# Altium PCB fullflex-1.PcbDoc (part 1 of 2)
Units mil, origin at the board's own origin, x right, y up, seen from the top; angles counter-clockwise.
Board outline 1000.01 x 1200 mil, 4 copper layers (NiCuAu, RF Layer, RF Ground, Signal Layer), stack 13.386 mil thick; 55 components, 23 nets, 173 pads, 89 vias.
Unrouted connection lines stored in the file: 143.
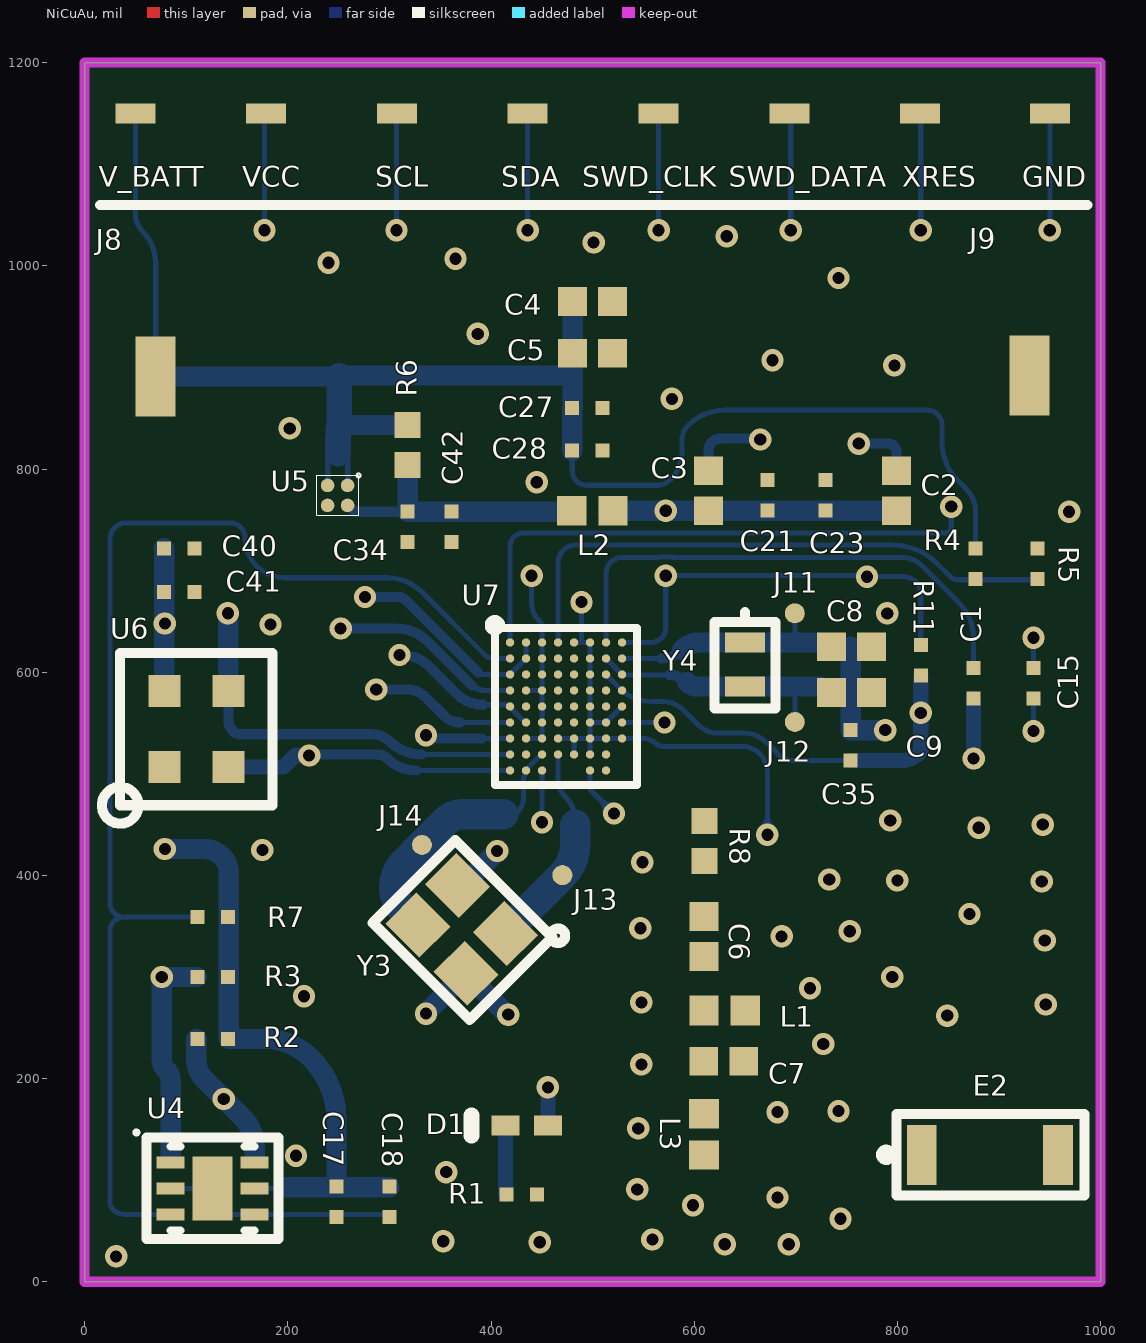
[diagram p0: NiCuAu view]
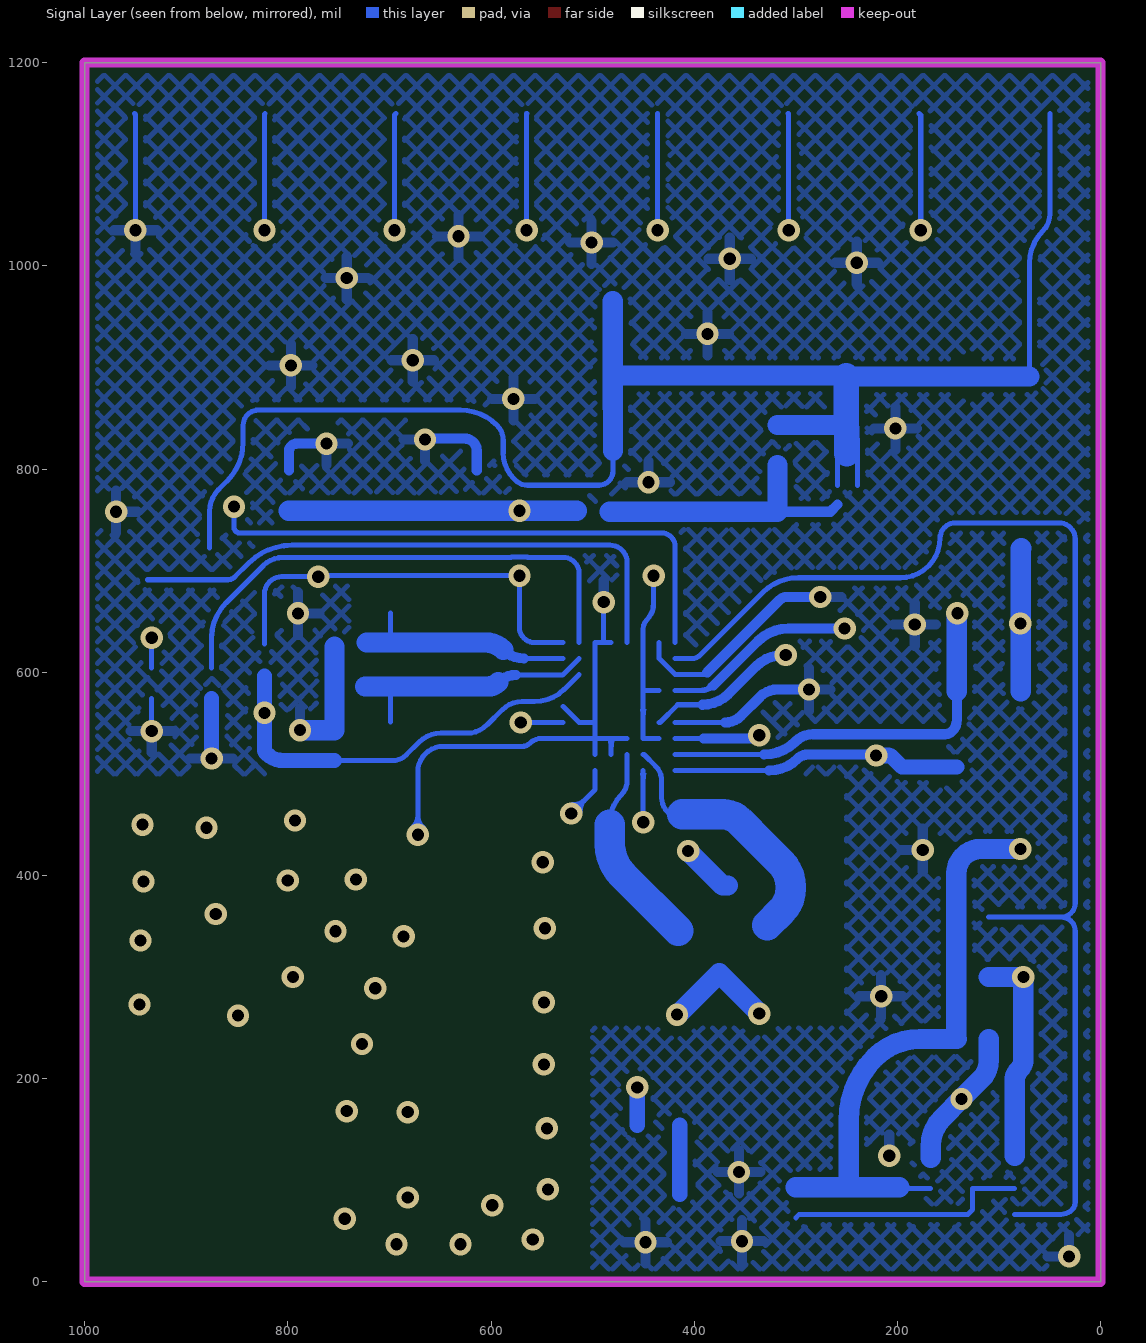
[diagram p1: Signal Layer view, seen from below]
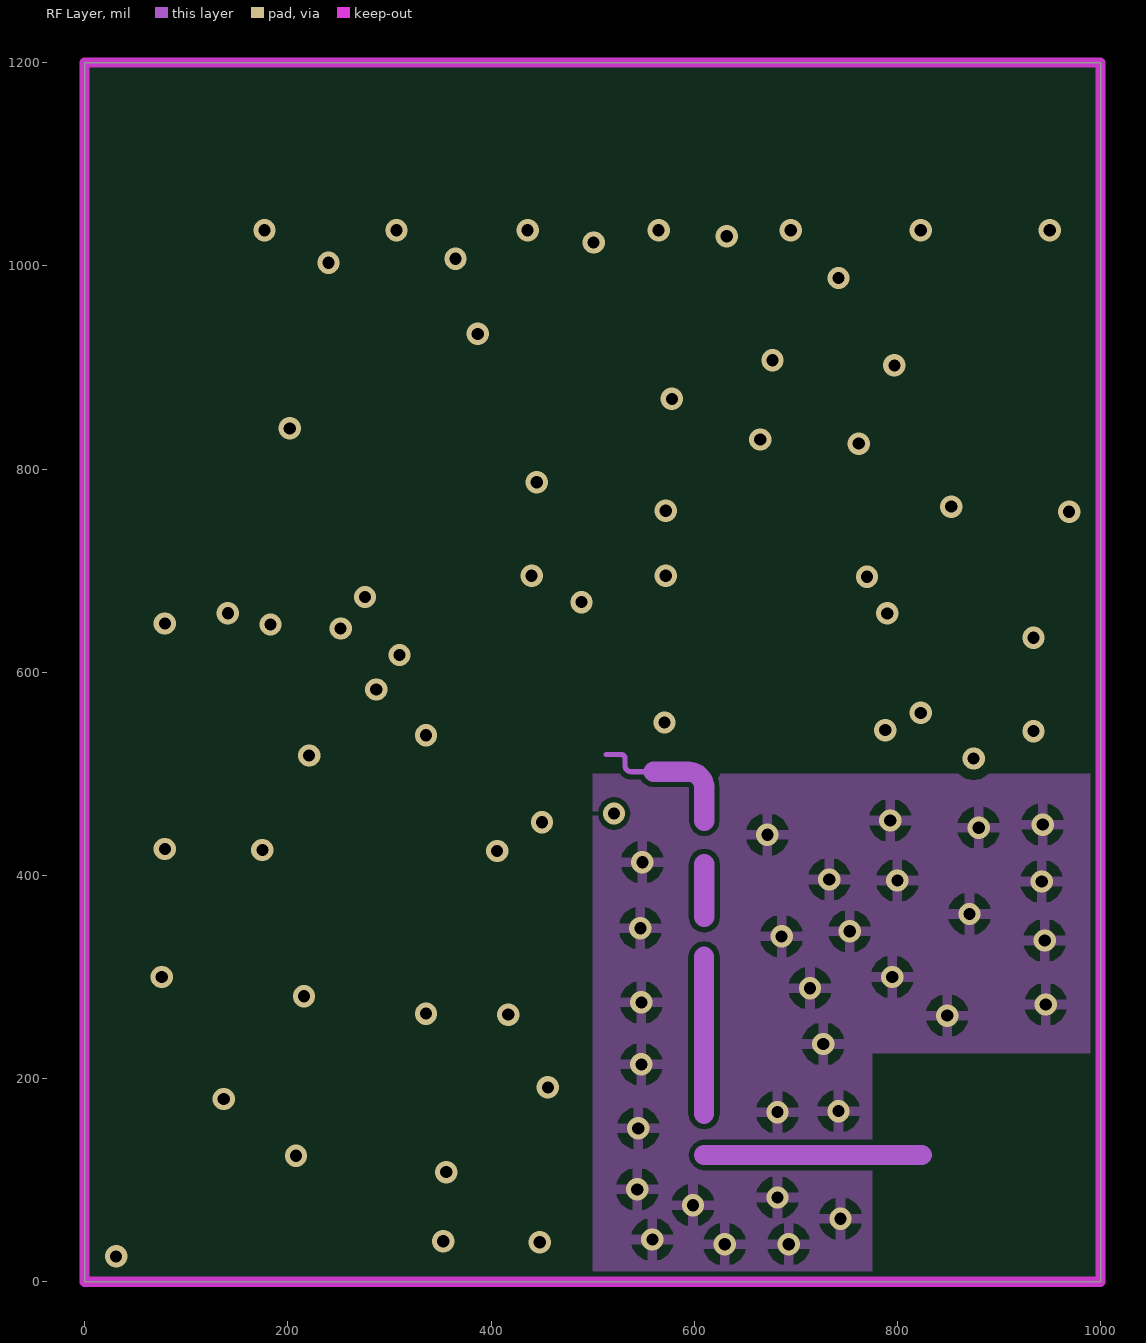
[diagram p2: RF Layer]
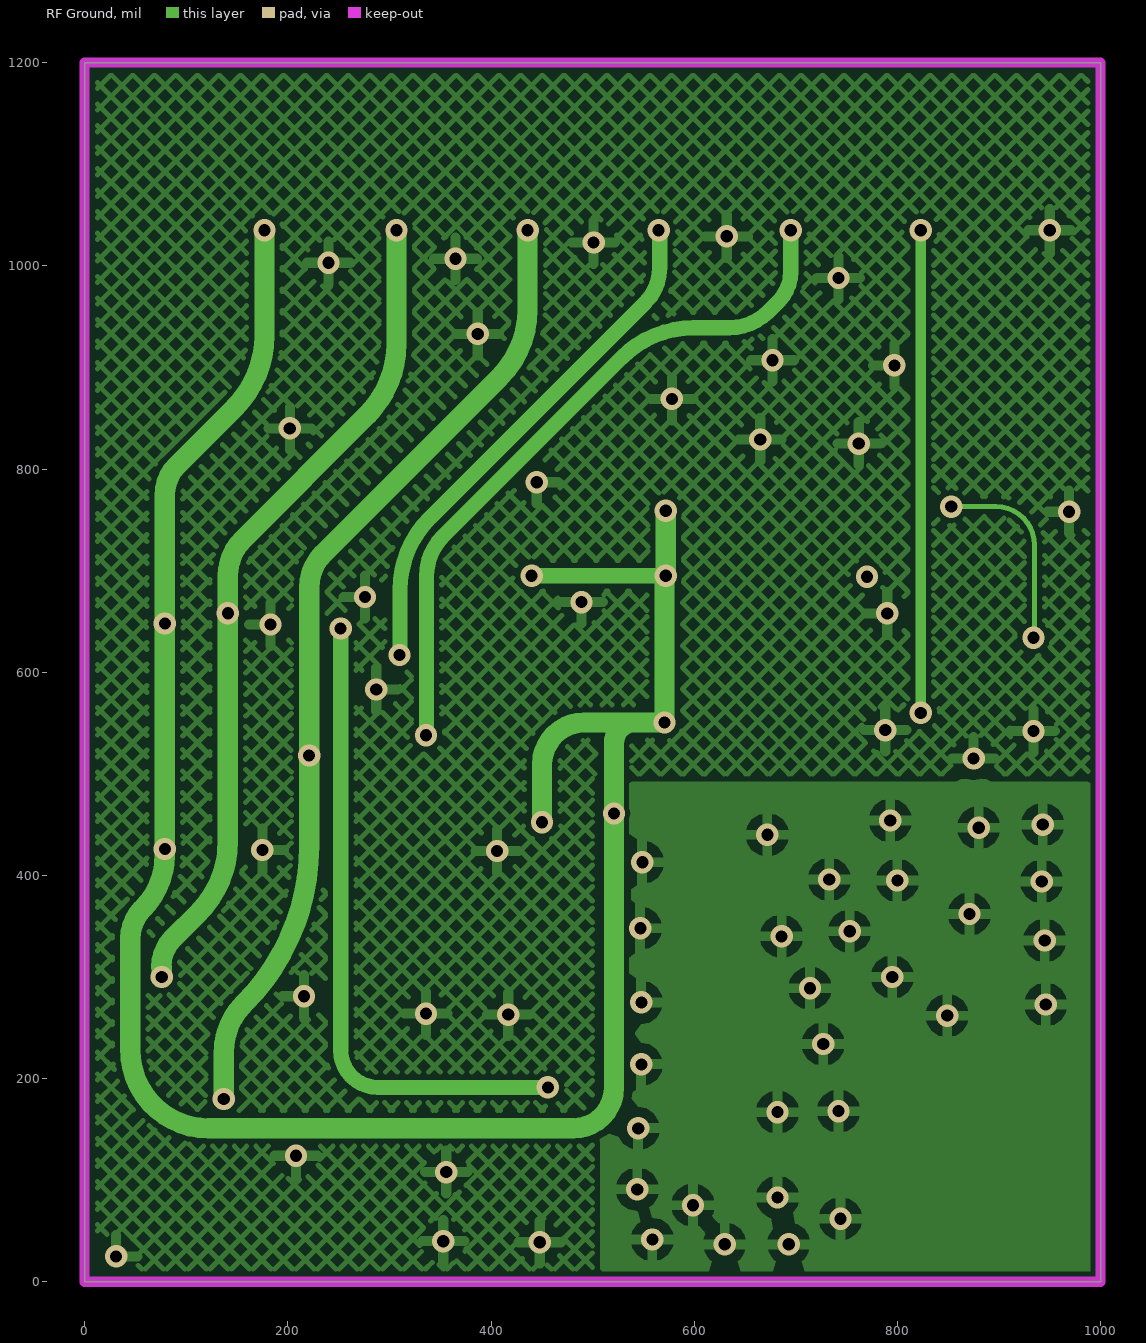
[diagram p3: RF Ground]

## Layer stack, top to bottom
Polyimide-1: solder mask 0.4, Solder Resist, Dk 3.5
NiCuAu: signal copper 0.04
Polyimide-2: prepreg 5, Polyimide, Dk 4.2
RF Layer: signal copper 1.417
Polyimide-3: dielectric 0.472, Dk 3.4
RF Ground: signal copper 1.417
Polyimide-4: prepreg 5, Dk 4.2
Signal Layer: signal copper 0.04

## Board outline
0,0 1000.01,0 999.92,1200 0,1200

## Design rules (kind name [scope] priority, off if disabled: settings)
Clearance "pour clearance" [(InNet('GND'))] p1: gap=5 ignorepadtopadclearanceinfootprint=FALSE
Clearance [All] p2: gap=5 ignorepadtopadclearanceinfootprint=FALSE
ComponentClearance [All] p1: gap=15.75 collisioncheckmode=3 verticalgap=10 showdistances=FALSE
DiffPairsRouting [All] p1: maxlimit=10 minlimit=5 mostfreqgap=10 toplayer_minwidth=5 toplayer_maxwidth=35 toplayer_prefwidth=7.5 midlayer1_minwidth=5 midlayer1_maxwidth=15 midlayer1_prefwidth=7.5 midlayer2_minwidth=5 midlayer2_maxwidth=15 midlayer2_prefwidth=7.5 bottomlayer_minwidth=5 bottomlayer_maxwidth=35 bottomlayer_prefwidth=7.5 maxuncoupledlength=500
FabricationTestPointUsage TestPointUsage [All] p1: valid=0 allowmultiple=FALSE
FabricationTestpoint Testpoint [All] p1: side=3 testpointundercomponent=TRUE minsize=40 maxsize=100 preferedsize=60 minholesize=0 maxholesize=40 preferedholesize=32 testpointgrid=1 allowsidetop=TRUE allowsidebottom=TRUE usegrid=TRUE gridtolerance=0.01
HoleSize [All] p1: absolutevalues=TRUE maxlimit=100 minlimit=12 maxpercent=80.000 minpercent=20.000
HoleToHoleClearance [All] p1: gap=16 allowstackedmicrovias=TRUE
MinimumAnnularRing [All] p1: minimumring=5
MinimumSolderMaskSliver [All] p1: minsoldermaskwidth=4
PolygonConnect [All] p1: connectstyle=Relief reliefconductorwidth=10 reliefentries=4 polygonreliefangle="90 Angle" airgapwidth=10
RoutingCorners [All] p1: cornerstyle=45-Degree minsetback=5 maxsetback=30
RoutingVias [All] p1: holewidth=12 width=22 viastyle="Through Hole" minholewidth=6 minwidth=20 maxholewidth=28 maxwidth=25
ShortCircuit [All] p1: allowed=TRUE
SilkToSilkClearance [All] p1: silktosilkclearance=6
SilkToSolderMaskClearance SilkscreenOverComponentPads [IsPad] p1: minsilkscreentomaskgap=6 clearancetoexposedcopper=TRUE
SolderMaskExpansion [All] p1: expansion=3
Width [All] p1: maxlimit=100 minlimit=5 preferedwidth=5
19 further rules are at their usual default settings.

## Classes and differential pairs
differential pair XTAL_LF: +XTAL_LF_P -XTAL_LF_N
differential pair XTAL_HF: +XTAL_HF_P -XTAL_HF_N

## Components (designator, comment, footprint, x,y, rotation, side; value= is the part's Value field where it differs from the comment)
C1 "1uF" CAP_0201(0603)_M 875,589 r270 top
C2 "10uF" CAP_0402(1005)_M 799,778.68 r90 top
C3 "10uF" CAP_0402(1005)_M 614,778.68 r90 top
C4 "10uF" CAP_0402(1005)_M 500,965 r0 top
C5 "10uF" CAP_0402(1005)_M 500,914 r0 top
C6 "0.5pF" CAP_0402(1005)_M 609.65,339.77 r270 top
C7 "2pF" CAP_0402(1005)_M 629,217 r0 top
C8 "39pF" CAP_0402(1005)_M 754.69,625 r0 top
C9 "18pF" CAP_0402(1005)_M 754.69,580 r0 top
C15 "1uF" CAP_0201(0603)_M 934,589 r270 top
C17 "100nF" CAP_0201(0603)_M 248,79 r270 top
C18 "1uF" CAP_0201(0603)_M 300,79 r270 top
C21 "1uF" CAP_0201(0603)_M 672,773.96 r90 top
C23 "1uF" CAP_0201(0603)_M 729,773.96 r90 top
C27 "1uF" CAP_0201(0603)_M 494.96,860 r0 top
C28 "1uF" CAP_0201(0603)_M 494.96,818 r0 top
C34 "100nF" CAP_0201(0603)_M 318,743.04 r270 top
C35 "100pF" CAP_0201(0603)_M 754,528 r90 top
C40 "1uF" CAP_0201(0603)_M 93,722 r180 top
C41 "100nF" CAP_0201(0603)_M 93,679 r180 top
C42 "1uF" CAP_0201(0603)_M 361,743.04 r270 top
D1 "Red" LED_0402(1005) 436,154 r180 top
E2 "2450AT18B100" 2450AT18B100 824,125 r0 top
GND "Probe-Pin Pad" POGO-PIN-PAD 950,1150 r90 top
J8 "Battery_Connector" BATTERY_PAD 70,891 r0 top
J9 "Battery_Connector" BATTERY_PAD 930,892 r0 top
J11 "Probe-CLOCK" POGO-CLOCK-PAD 699,658 r90 top
J12 "Probe-CLOCK" POGO-CLOCK-PAD 699,551 r90 top
J13 "Probe-CLOCK" POGO-CLOCK-PAD 470.27,400.27 r90 top
J14 "Probe-CLOCK" POGO-CLOCK-PAD 332,430 r270 top
L1 "2nh" IND_0402(1005)_M 630,267 r180 top
L2 "1uh" IND_0402(1005)_M 499.75,759 r0 top
L3 "9nh" IND_0402(1005)_M 609.65,145.08 r270 top
R1 "270R" RES_0201(0603)_M 430.09,86 r0 top
R2 "4.7kR" RES_0201(0603)_M 126,239 r180 top
R3 "4.7kR" RES_0201(0603)_M 126,300 r180 top
R4 "100kR" RES_0201(0603)_M 877,706.75 r270 top
R5 "30kR" RES_0201(0603)_M 938,706.75 r90 top
R6 "0mR" RES_0402(1005)_M 318,823.69 r270 top
R7 "4.7kR" RES_0201(0603)_M 126.25,359 r0 top
R8 "0mR" RES_0402(1005)_M 610,434 r270 top
R11 "4.7kR" RES_0201(0603)_M 823,612 r270 top
SCL "Probe-Pin Pad" POGO-PIN-PAD 307.43,1150 r90 top
SDA "Probe-Pin Pad" POGO-PIN-PAD 436.14,1150 r90 top
SWD_CLK "Probe-Pin Pad" POGO-PIN-PAD 564.86,1150 r90 top
SWD_DATA "Probe-Pin Pad" POGO-PIN-PAD 693.57,1150 r90 top
U4 "TMP116" WSON-6 126,92 r0 top
U5 "ADP172" ADP172 249,774 r270 top
U6 "GUVB-C31SM" GUVB-C31SM 110,544 r180 top
U7 "CY8C4127FNI-BL483" WLCSP-68 473.87,566.25 r0 top
V_BATT "Probe-Pin Pad" POGO-PIN-PAD 50,1150 r90 top
VCC "Probe-Pin Pad" POGO-PIN-PAD 178.71,1150 r90 top
XRES "Probe-Pin Pad" POGO-PIN-PAD 822.29,1150 r90 top
Y3 "ECX-2236" ECX-2236 414.33,342.67 r135 top
Y4 "32.768KHz" ABS05 649.87,629.25 r270 top

## Footprints (in the part's own frame and the unit in brackets; to place one, negate y for a bottom-side part, rotate by r counter-clockwise, add the part's x,y. Pads: shape width x height; smd on the part's side, far side on the other; paste and mask are expansions set on the pad)
2450AT18B100 [mm] "2.4GHz Mini Antenna SMD, 50 ohm Resistence"
  rect 0.74x1.5 smd mask+0.03: 1(0,0) 2(3.406,0)
  silkscreen extent -1.02,-1.02 4.06,1.02, body extent -0.05,-0.9 3.35,0.9, height 1.4
ABS05 [mm] "32.768 kHz CRYSTAL 12.5 PF +/-20ppm"
  rect 0.5x1 smd mask+0.1: 1(0,0) 2(1.102,0)
  silkscreen extent -0.76,-0.76 1.65,0.76, body extent -0.25,-0.5 1.35,0.5, height 0.5
ADP172 [mm] "4-Ball WLCSP, CB-4-4"
  round 0.34 smd paste+0.01 mask+0.01: A1(-0.25,0.25) A2(0.25,0.25) B1(-0.25,-0.25) B2(0.25,-0.25)
  silkscreen extent -0.55,-0.53 0.5,0.58, body extent -0.48,-0.48 0.48,0.48, height 0.69
BATTERY_PAD [mm]
  rect 1x2 smd: 1(0,0)
CAP_0201(0603)_M [mm] "Chip Capacitor, Body 0.6x0.3mm, Height 0.33mm, IPC Low Density"
  rect 0.35x0.35 smd mask+0: 1(-0.381,0) 2(0.381,0)
  body extent -0.31,-0.17 0.32,0.16, height 0.33
CAP_0402(1005)_M [mm] "Chip Capacitor, Body 1.0x0.5mm, Height 0.6mm, IPC Low Density"
  rect 0.72x0.72 smd: 1(-0.5,0) 2(0.5,0)
  body extent -0.55,-0.3 0.55,0.3, height 0.6
ECX-2236 [mm] "48 MHz CRYSTAL 2.5X2.0mm"
  rect 1.2x1.1 smd mask+0.05: 1(0,0) 2(1.7,0) 4(0,1.4)
  rect 1.2x1.1 smd paste+0 mask+0.05: 3(1.7,1.4)
  silkscreen extent -1.14,-1.07 2.54,2.16, body extent -0.36,-0.24 2.14,1.76, height 0.8
GUVB-C31SM [mm]
  rect 0.8x0.8 smd: 1(0.8,0.95) 2(-0.8,0.95) 3(-0.8,-0.95) 4(0.8,-0.95)
  silkscreen extent -1.91,-1.91 2.36,2.36, body extent -1,-1.15 1,1.15, height 1.4
IND_0402(1005)_M [mm] "Chip Inductor, 2-Leads, Body 1.1x0.6mm, IPC Low Density"
  rect 0.73x0.74 smd: 1(-0.515,0) 2(0.515,0)
  body extent -0.55,-0.3 0.55,0.3, height 0.45
LED_0402(1005) [mm] "SMD, 2-Leads, Body 1x0.5mm"
  rect 0.7x0.5 smd: A(-0.508,0) K(0.55,0)
  silkscreen extent 1.4,-0.25 1.4,0.25, body extent -0.5,-0.25 0.5,0.25, height 0.6
POGO-CLOCK-PAD [mm]
  round 0.5 smd: 1(0,0)
POGO-PIN-PAD [mm]
  rect 0.5x1 smd: 1(0,0)
  body extent -0.16,-0.31 0.17,0.32, height 0.33
RES_0201(0603)_M [mm] "Chip Resistor, Body 0.6x0.3mm, IPC Low Density"
  rect 0.35x0.35 smd mask-0.05: 1(-0.381,0)
  rect 0.35x0.35 smd mask-0.5: 2(0.381,0)
  body extent -0.31,-0.16 0.31,0.16, height 0.3
RES_0402(1005)_M [mm] "Chip Resistor, 2-Leads, Body 1.05x0.55mm, IPC Low Density"
  rect 0.65x0.65 smd: 1(-0.5,0) 2(0.5,0)
  body extent -0.53,-0.28 0.53,0.28, height 0.4
WLCSP-68 [mm] "PSOC 4 BLE CY8C4247FNI-BL483 N40P8X9_352X391X55"
  round 0.21 smd mask+0: A1(-1.4,1.6) A2(-1,1.6) A3(-0.6,1.6) A4(-0.2,1.6) A5(0.2,1.6) A6(0.6,1.6) A7(1,1.6) A8(1.4,1.6) B1(-1.4,1.2) B2(-1,1.2) B3(-0.6,1.2) B4(-0.2,1.2) B5(0.2,1.2) B6(0.6,1.2) B7(1,1.2) B8(1.4,1.2) C1(-1.4,0.8) C2(-1,0.8) C3(-0.6,0.8) C5(0.2,0.8) C6(0.6,0.8) C7(1,0.8) C8(1.4,0.8) D1(-1.4,0.4) D2(-1,0.4) D3(-0.6,0.4) D4(-0.2,0.4) D5(0.2,0.4) D6(0.6,0.4) D7(1,0.4) D8(1.4,0.4) E1(-1.4,0) E2(-1,0) E3(-0.6,0) E4(-0.2,0) E5(0.2,0) E6(0.6,0) E7(1,0) E8(1.4,0) F1(-1.4,-0.4) F2(-1,-0.4) F3(-0.6,-0.4) F4(-0.2,-0.4) F5(0.2,-0.4) F6(0.6,-0.4) F7(1,-0.4) F8(1.4,-0.4) G1(-1.4,-0.8) G2(-1,-0.8) G3(-0.6,-0.8) G4(-0.2,-0.8) G5(0.2,-0.8) G6(0.6,-0.8) G7(1,-0.8) G8(1.4,-0.8) H1(-1.4,-1.2) H2(-1,-1.2) H3(-0.6,-1.2) H4(-0.2,-1.2) H5(0.2,-1.2) H6(0.6,-1.2) H7(1,-1.2) J1(-1.4,-1.6) J2(-1,-1.6) J3(-0.6,-1.6) J6(0.6,-1.6) J7(1,-1.6)
  round 0.21 smd mask-0.05: C4(-0.2,0.8)
  silkscreen extent -1.9,-1.97 1.77,2.16, body extent -1.77,-1.97 1.77,1.97, height 0.55
WSON-6 [mm] "SON, 6-Leads, Body 2x2mm, Pitch 0.65mm, Thermal Pad 1X1.6mm"
  rect 0.7x0.3 smd: 1(-1.05,0.65) 2(-1.05,0) 3(-1.05,-0.65) 4(1.05,-0.65) 5(1.05,0) 6(1.05,0.65)
  rect 1x1.6 smd: 7(0,0)
  silkscreen extent -1.95,-1.27 1.65,1.45, body extent -1,-1 1,1, height 0.8

## Part data
C1 C15 C18 C21 C23 C27 C28 C40 C42: library part C-0201(0603), "___ OHM ___ mW 0201(0603) SMD", Case/Package=0201, Case Code (Metric)=0603, Dielectric=X6S, Manufacturer=Murata, Manufacturer Part Number=GRM033C81A105ME05D, Max Operating Temperature=105°C, Min Operating Temperature=-55°C, Supplier Part Number 1=490-13219-1-ND, Tolerance=20%, Voltage Rating=10V, Capacitance=1uF, Case Code (Imperial)=0201, ComponentLink1Description=http://search.murata.co.jp/Ceramy/image/img/A01X/partnumbering_e_01.pdf, ComponentLink1URL=http://search.murata.co.jp/Ceramy/image/img/A01X/partnumbering_e_01.pdf, Description 1="1µF 10V Ceramic Capacitor X6S 0201 (0603 Metric) 0.024\" L x 0.012\" W (0.60mm x 0.30mm)", Length=0.024inch, Mount="Surface Mount", Packaging="Tape and Reel", Pricing 1="1=0.48, 10=0.333, 100=0.1997, 500=0.1498, 1000=0.1265, 2500=0.1198, 5000=0.1132 (USD)", Stock 1=1199738, Supplier 1=Digi-Key, Thickness=0.015inch, Voltage Rating (DC)=10V, Width=0.012inch
C2 C3 C4 C5: library part C-0402(1005), "___ OHM ___ mW 0402(1005) SMD", Case/Package=0402, Case Code (Metric)=1005, Dielectric=X5R, Manufacturer=Murata, Manufacturer Part Number=GRM155R60J106ME15D, Max Operating Temperature=85°C, Min Operating Temperature=-55°C, Supplier Part Number 1=490-13238-1-ND, Tolerance=20%, Voltage Rating=6.3V, Capacitance=10uF, Case Code (Imperial)=0402, ComponentLink1Description=http://search.murata.co.jp/Ceramy/image/img/A01X/partnumbering_e_01.pdf, ComponentLink1URL=http://search.murata.co.jp/Ceramy/image/img/A01X/partnumbering_e_01.pdf, Description 1="10µF 6.3V Ceramic Capacitor X5R 0402 (1005 Metric) 0.039\" L x 0.020\" W (1.00mm x 0.50mm)", Length=0.039inch, Mount="Surface Mount", Packaging="Tape and Reel", Pricing 1="1=0.29, 10=0.196, 100=0.0994, 500=0.068, 1000=0.0602, 2500=0.0576, 5000=0.0523 (USD)", Stock 1=427251, Supplier 1=Digi-Key, Thickness=0.026inch, Voltage Rating (DC)=6.3V, Width=0.02inch
C6: library part C-0402(1005), "___ OHM ___ mW 0402(1005) SMD", Case/Package=0402, Case Code (Metric)=1005, Dielectric=C0G, Manufacturer=Murata, Manufacturer Part Number=GJM1555C1HR50WB01D, Max Operating Temperature=125°C, Min Operating Temperature=-55°C, Package Quantity=10000, Supplier Part Number 1=490-11250-1-ND, Voltage=50V, Capacitance=0.5pF, Case Code (Imperial)=0402, ComponentLink1Description=https://datasheet.ciiva.com/169/product-169683.pdf, ComponentLink1URL=https://datasheet.ciiva.com/169/product-169683.pdf, Depth=0.5mm, Description 1="Multilayer Ceramic Capacitors MLCC - SMD/SMT 0402 0.5pF 50Volts C0G +/-0.05pF", Height=0.5mm, Lead Free="Lead Free", Length=1mm, Mount="Surface Mount", Packaging="Tape and Reel", Pricing 1="1=0.3, 10=0.205, 100=0.1161, 500=0.082, 1000=0.0717, 2500=0.0683, 5000=0.0632 (USD)", Radiation Hardening=No, Stock 1=57275, Supplier 1=Digi-Key, Termination=SMD/SMT, Thickness=0.022inch, Voltage Rating=50V, Voltage Rating (DC)=50V, Width=0.02inch
C7: library part C-0402(1005), "___ OHM ___ mW 0402(1005) SMD", Case/Package=0402, Case Code (Metric)=1005, Dielectric=C0G, Manufacturer=Murata, Manufacturer Part Number=GJM1555C1H2R0BB01D, Max Operating Temperature=125°C, Min Operating Temperature=-55°C, Package Quantity=1, Supplier Part Number 1=490-8091-1-ND, Voltage Rating=50V, Capacitance=2pF, Case Code (Imperial)=0402, ComponentLink1Description=https://datasheet.ciiva.com/5694/1700193-5694978.pdf, ComponentLink1URL=https://datasheet.ciiva.com/5694/1700193-5694978.pdf, ComponentLink2Description=https://datasheet.ciiva.com/16440/l0005e-16440476.pdf, ComponentLink2URL=https://datasheet.ciiva.com/16440/l0005e-16440476.pdf, ComponentLink3Description=https://datasheet.ciiva.com/17453/product-17453487.pdf, ComponentLink3URL=https://datasheet.ciiva.com/17453/product-17453487.pdf, Depth=0.5mm, Description 1="Multilayer Ceramic Capacitors MLCC - SMD/SMT 0402 2.0pF 50Volts C0G +/-0.1pF", Height=0.5mm, Lead Free="Lead Free", Lead Pitch=0.3mm, Length=1mm, Mount="Surface Mount", Number of Pins=2, Packaging="Tape and Reel", Pricing 1="1=0.19, 10=0.13, 100=0.0659, 500=0.0451, 1000=0.0399, 2500=0.0381, 5000=0.0347 (USD)", Radiation Hardening=No, REACH SVHC="No SVHC", Stock 1=103779, Supplier 1=Digi-Key, Termination=SMD/SMT, Thickness=0.022inch, Voltage Rating (DC)=50V, Width=0.5mm
C8: library part C-0402(1005), "___ OHM ___ mW 0402(1005) SMD", Case/Package=0402, Case Code (Metric)=1005, Dielectric=C0G, Manufacturer=KEMET, Manufacturer Part Number=CBR04C390F5GAC, Max Operating Temperature=125°C, Min Operating Temperature=-55°C, Package Quantity=10000, Supplier Part Number 1=399-16083-1-ND, Tolerance=1%, Voltage Rating (DC)=50V, Capacitance=39pF, Case Code (Imperial)=0402, ComponentLink1Description=http://www.mouser.com/ds/2/212/KEM_C1030_CBR_SMD-346920.pdf, ComponentLink1URL=http://www.mouser.com/ds/2/212/KEM_C1030_CBR_SMD-346920.pdf, Description 1="Multilayer Ceramic Capacitors MLCC - SMD/SMT 39pF 50volts 1%", Height=0.5mm, Length=1mm, Packaging="Tape and Reel", Pricing 1="1=0.54, 10=0.374, 100=0.2247, 500=0.1685, 1000=0.1423, 2500=0.1348, 5000=0.1273 (USD)", Stock 1=6320, Supplier 1=Digi-Key, Termination=SMD/SMT, Weight=2.3E-05oz, Width=0.5mm
C9: library part C-0402(1005), "___ OHM ___ mW 0402(1005) SMD", Case/Package=0402, Case Code (Metric)=1005, Dielectric=C0G, Manufacturer=Murata, Manufacturer Part Number=GJM1555C1H180FB01D, Max Operating Temperature=125°C, Min Operating Temperature=-55°C, Package Quantity=10000, Supplier Part Number 1=490-11192-1-ND, Tolerance=1%, Voltage Rating=50V, Capacitance=18pF, Case Code (Imperial)=0402, ComponentLink1Description=https://datasheet.ciiva.com/11607/c02e-11607834.pdf, ComponentLink1URL=https://datasheet.ciiva.com/11607/c02e-11607834.pdf, Depth=0.5mm, Description 1="Multilayer Ceramic Capacitors MLCC - SMD/SMT 0402 18pF 50Volts C0G 1%", Height=0.5mm, Lead Free="Lead Free", Length=1mm, Mount="Surface Mount", Packaging="Tape and Reel", Pricing 1="1=0.24, 10=0.162, 100=0.0822, 500=0.0563, 1000=0.0498, 2500=0.0476, 5000=0.0433 (USD)", Radiation Hardening=No, Stock 1=51032, Supplier 1=Digi-Key, Termination=SMD/SMT, Thickness=0.022inch, Voltage Rating (DC)=50V, Width=0.02inch
C17 C34 C41: library part C-0201(0603), "___ OHM ___ mW 0201(0603) SMD", Case/Package=0201, Case Code (Metric)=0603, Dielectric=X5R, Manufacturer=Murata, Manufacturer Part Number=GRM033R61A104ME15D, Max Operating Temperature=85°C, Min Operating Temperature=-55°C, Package Quantity=10, Supplier Part Number 1=490-5405-1-ND, Tolerance=20%, Voltage Rating=10V, Capacitance=100nF, Case Code (Imperial)=0201, ComponentLink1Description=https://datasheet.ciiva.com/131/partnumbering-e-01-131478.pdf, ComponentLink1URL=https://datasheet.ciiva.com/131/partnumbering-e-01-131478.pdf, ComponentLink2Description=https://datasheet.ciiva.com/131/partnumbering-e-01-131479.pdf, ComponentLink2URL=https://datasheet.ciiva.com/131/partnumbering-e-01-131479.pdf, Depth=0.3mm, Description 1="Cap Ceramic 0.1uF 10V X5R 20% SMD 0201 85C Paper T/R", Lead Free="Lead Free", Length=0.024inch, Mount="Surface Mount", Packaging="Tape and Reel", Pricing 1="1=0.1, 10=0.021, 100=0.0092, 500=0.0066, 1000=0.0052, 2500=0.0047, 5000=0.0043 (USD)", Stock 1=5696, Supplier 1=Digi-Key, Thickness=0.013inch, Voltage Rating (DC)=10V, Width=0.012inch
C35: library part C-0201(0603), "___ OHM ___ mW 0201(0603) SMD", Case/Package=0201, Case Code (Metric)=0603, Dielectric=X7R, Manufacturer=Murata, Manufacturer Part Number=GRM033R71C101KA01D, Max Operating Temperature=125°C, Min Operating Temperature=-55°C, Package Quantity=15000, Supplier Part Number 1=490-6146-1-ND, Tolerance=10%, Voltage Rating=16V, Capacitance=100pF, Case Code (Imperial)=0201, ComponentLink1Description=https://datasheet.ciiva.com/11605/product-11605537.pdf, ComponentLink1URL=https://datasheet.ciiva.com/11605/product-11605537.pdf, ComponentLink2Description=https://datasheet.ciiva.com/6263/partnumbering-e-01-6263654.pdf, ComponentLink2URL=https://datasheet.ciiva.com/6263/partnumbering-e-01-6263654.pdf, ComponentLink3Description=https://datasheet.ciiva.com/6263/partnumbering-e-01-6263658.pdf, ComponentLink3URL=https://datasheet.ciiva.com/6263/partnumbering-e-01-6263658.pdf, ComponentLink4Description=https://datasheet.ciiva.com/18184/getdatasheetpartid-254442-18184076.pdf, ComponentLink4URL=https://datasheet.ciiva.com/18184/getdatasheetpartid-254442-18184076.pdf, Depth=0.3mm, Description 1="Multilayer Ceramic Capacitors MLCC - SMD/SMT 100pF 16 volts 10%", Height=0.3mm, Lead Free="Lead Free", Length=0.6mm, Mount="Surface Mount", Packaging="Tape and Reel", Pricing 1="1=0.1, 10=0.033, 100=0.0148, 500=0.0106, 1000=0.0083, 2500=0.0076, 5000=0.007 (USD)", Radiation Hardening=No, Stock 1=195000, Supplier 1=Digi-Key, Termination=SMD/SMT, Thickness=0.013inch, Voltage Rating (DC)=16V, Width=0.012inch
D1: library part LED_0402(1005), "LED, 0402(1005) SMD", Case/Package=0402, Case Code (Metric)=1005, Forward Current=20mA, Forward Voltage=1.95V, Lens Colour=Clear, Manufacturer=Kingbright, Manufacturer Part Number=APHHS1005SURCK, Max Operating Temperature=85°C, Min Operating Temperature=-40°C, Package Quantity=2000, Supplier Part Number 1=754-1104-1-ND, Case Code (Imperial)=0402, Colour=Red, ComponentLink1Description=https://datasheet.ciiva.com/14603/70062833-14603899.pdf, ComponentLink1URL=https://datasheet.ciiva.com/14603/70062833-14603899.pdf, ComponentLink2Description=https://datasheet.ciiva.com/2114/aphhs1005surck-2114140.pdf, ComponentLink2URL=https://datasheet.ciiva.com/2114/aphhs1005surck-2114140.pdf, ComponentLink3Description=https://datasheet.ciiva.com/4689/aphhs1005surck-32322-4689068.pdf, ComponentLink3URL=https://datasheet.ciiva.com/4689/aphhs1005surck-32322-4689068.pdf, ComponentLink4Description=https://datasheet.ciiva.com/2114/aphhs1005surck-2114141.pdf, ComponentLink4URL=https://datasheet.ciiva.com/2114/aphhs1005surck-2114141.pdf, ComponentLink5Description=https://datasheet.ciiva.com/2114/aphhs1005surck-2114142.pdf, ComponentLink5URL=https://datasheet.ciiva.com/2114/aphhs1005surck-2114142.pdf, Description 1="LED 1X0.5MM 630NM RD WTR CLR SMD", Dominant Wavelength=630nm, Height=0.6mm, Illumination Colour=Red, Lead Free="Lead Free", Length=1mm, Lens Style=Flat,Clear, Luminous Intensity=220mcd, Mount="Surface Mount", Number of LEDs=1, Number of Pins=2, Packaging="Tape and Reel", Pricing 1="1=0.44, 10=0.318, 25=0.2596, 100=0.2077, 250=0.1752, 500=0.1493, 1000=0.1168 (USD)", Stock 1=195639, Supplier 1=Digi-Key, Test Current=20mA, Viewing Angle=120°, Wavelength=635nm, Width=0.5mm
E2: "2.4 GHz BLE Antenna", Case/Package=CSMD, Frequency=2.45GHz, Manufacturer=Johanson, Manufacturer Part Number=2450AT18B100E, Max Frequency=2.5GHz, Max Power Dissipation=3W, Package Quantity=1, Supplier Part Number 1=712-1006-1-ND, Bandwidth=100MHz, ComponentLink1Description=https://datasheet.ciiva.com/1124/1318299-1124918.pdf, ComponentLink1URL=https://datasheet.ciiva.com/1124/1318299-1124918.pdf, ComponentLink2Description=https://datasheet.ciiva.com/24025/antenna-2450at18b100-242422-24025839.pdf, ComponentLink2URL=https://datasheet.ciiva.com/24025/antenna-2450at18b100-242422-24025839.pdf, Contact Plating=Tin, Description 1="JOHANSON TECHNOLOGY         2450AT18B100E             ANTENNA, CERAMIC, 2.45GHZ", Gain=-0.5dB, Height=0.051inch, Impedance=50R, Length=3.2mm, Mount="Surface Mount", Number of Bands=1, Packaging="Tape and Reel", Power Rating=3W, Pricing 1="1=0.62, 10=0.541, 25=0.4788, 100=0.4172, 250=0.3631, 500=0.309, 1000=0.2472 (USD)", REACH SVHC="No SVHC", Return Loss=-9.5dB, Stock 1=187598, Supplier 1=Digi-Key, Termination=Solder, Width=1.6mm
L1: library part I-0402(1005), Case/Package=0402, Case Code (Metric)=1005, Current Rating=1.04A, DC Resistance (DCR)=70mR, Manufacturer=Abracon, Manufacturer Part Number=AISC-0402-2N0J-T, Max Operating Temperature=125°C, Min Operating Temperature=-40°C, Package Quantity=10000, Self Resonant Frequency=11.1GHz, Supplier Part Number 1=535-10424-6-ND, Test Frequency=250MHz, Tolerance=5%, Case Code (Imperial)=0402, ComponentLink1Description=https://datasheet.ciiva.com/1054/aisc-0402-1054032.pdf, ComponentLink1URL=https://datasheet.ciiva.com/1054/aisc-0402-1054032.pdf, ComponentLink2Description=https://datasheet.ciiva.com/26928/getdatasheetpartid-762366-26928064.pdf, ComponentLink2URL=https://datasheet.ciiva.com/26928/getdatasheetpartid-762366-26928064.pdf, ComponentLink3Description=https://datasheet.ciiva.com/11140/aisc-0402-11140262.pdf, ComponentLink3URL=https://datasheet.ciiva.com/11140/aisc-0402-11140262.pdf, ComponentLink4Description=https://datasheet.ciiva.com/1054/aisc-0402-1054030.pdf, ComponentLink4URL=https://datasheet.ciiva.com/1054/aisc-0402-1054030.pdf, ComponentLink5Description=https://datasheet.ciiva.com/1054/aisc-0402-1054031.pdf, ComponentLink5URL=https://datasheet.ciiva.com/1054/aisc-0402-1054031.pdf, Composition=Wirewound,Ceramic, Core Material=Ceramic, DC Current=1.04A, Depth=0.64mm, Description 1="2nH Unshielded Wirewound Inductor 1.04A 70 mOhm Max 0402 (1005 Metric)", Height=0.66mm, Height - Seated (Max)=0.026inch, Inductance=2nh, Length=1.19mm, Max DC Current=1.04A, Military Standard=Not, Mount="Surface Mount", Number of Pins=2, Packaging="Tape and Reel", Pricing 1="1=0.33, 10=0.297, 25=0.264, 50=0.231, 100=0.2145, 500=0.1881, 750=0.1716, 1000=0.1518 (USD)", Q Factor=16, Radiation Hardening=No, Shielding=Unshielded, Stock 1=5165, Supplier 1=Digi-Key, Termination=SMD/SMT, Width=0.025inch
L2: library part "Inductor Iron", "Magnetic-Core Inductor", Case/Package=0402, Case Code (Metric)=1005, Current Rating=450mA, DC Resistance (DCR)=455mR, Manufacturer=TDK, Manufacturer Part Number=MLZ1005M1R0WT000, Max Operating Temperature=125°C, Min Operating Temperature=-55°C, Package Quantity=10000, Saturation Current=100mA, Self Resonant Frequency=170MHz, Supplier Part Number 1=445-6379-1-ND, Test Frequency=2MHz, Tolerance=20%, Case Code (Imperial)=0402, ComponentLink1Description=https://datasheet.ciiva.com/29699/inductor-commercial-decoupling-mlz-en-29699052.pdf, ComponentLink1URL=https://datasheet.ciiva.com/29699/inductor-commercial-decoupling-mlz-en-29699052.pdf, ComponentLink2Description=https://datasheet.ciiva.com/29699/inductor-commercial-decoupling-mlz-en-29699053.pdf, ComponentLink2URL=https://datasheet.ciiva.com/29699/inductor-commercial-decoupling-mlz-en-29699053.pdf, Core Material=Ferrite, Description 1="FIXED IND 1UH 450MA 350 MOHM SMD", Height - Seated (Max)=0.022inch, Inductance=1uh, Length=0.039inch, Mount="Surface Mount", Packaging="Tape and Reel", Pricing 1="1=0.29, 10=0.258, 100=0.1771, 500=0.1513, 1000=0.1159, 2500=0.1095 (USD)", Shielding=Shielded, Stock 1=22743, Supplier 1=Digi-Key, Width=0.02inch
L3: library part I-0402(1005), Case/Package=0402, Current Rating=1.42A, DC Resistance (DCR)=70mR, Manufacturer=Murata, Manufacturer Part Number=LQW15AN9N0G80D, Max Operating Temperature=125°C, Min Operating Temperature=-55°C, Self Resonant Frequency=6.5GHz, Supplier Part Number 1=490-14715-1-ND, Test Frequency=100MHz, Tolerance=2%, Composition=Wirewound, Description 1="9nH Unshielded Wirewound Inductor 1.42A 70 mOhm Max 0402 (1005 Metric)", Height - Seated (Max)=0.024inch, Inductance=9nh, Length=0.039inch, Mount="Surface Mount", Packaging="Tape and Reel", Pricing 1="1=0.25, 10=0.221, 100=0.1518, 500=0.1297, 1000=0.0994, 2500=0.0938 (USD)", Shielding=Unshielded, Stock 1=3213, Supplier 1=Digi-Key, Width=0.024inch
R1: library part R-0201(0603), "___ OHM ___ mW 0201(0603) SMD", Case/Package=0201, Manufacturer=Yageo, Manufacturer Part Number=RC0201JR-07270RL, Max Operating Temperature=125°C, Min Operating Temperature=-55°C, Power Rating=50mW, Supplier Part Number 1=311-270NCT-ND, Temperature Coefficient=200ppm/°C, Tolerance=5%, ComponentLink1Description=https://datasheet.ciiva.com/16855/pyu-rc0201-51-rohs-l-8-16855339.pdf, ComponentLink1URL=https://datasheet.ciiva.com/16855/pyu-rc0201-51-rohs-l-8-16855339.pdf, ComponentLink2Description=https://datasheet.ciiva.com/28392/pyu-rc0201-51-rohs-l-8-28392445.pdf, ComponentLink2URL=https://datasheet.ciiva.com/28392/pyu-rc0201-51-rohs-l-8-28392445.pdf, Composition="Thick Film", Contact Plating=Tin,Matte, Depth=0.3mm, Description 1="Res Thick Film 0201 270 Ohm 5% 0.05W(1/20W) ±200ppm/C Molded SMD Paper T/R", Lead Free="Lead Free", Length=0.6mm, Military Standard=Not, Packaging="Tape and Reel", Pricing 1="1=0.1, 10=0.043, 100=0.0174, 1000=0.0078, 2500=0.0068, 5000=0.0056 (USD)", Radiation Hardening=No, Resistance=270R, Stock 1=26098, Supplier 1=Digi-Key
R2 R3 R7 R11: library part R-0201(0603), "___ OHM ___ mW 0201(0603) SMD", Case/Package=0201, Case Code (Metric)=0603, Manufacturer=Samsung, Manufacturer Part Number=RC0603F472CS, Max Operating Temperature=125°C, Max Power Dissipation=50mW, Min Operating Temperature=-55°C, Package Quantity=1, Supplier Part Number 1=1276-3651-1-ND, Temperature Coefficient=250ppm/°C, Tolerance=1%, Voltage Rating (DC)=25V, Case Code (Imperial)=0201, ComponentLink1Description=http://components.arrow.com/part/dataview/52317213S9968065N4139, ComponentLink1URL=http://components.arrow.com/part/dataview/52317213S9968065N4139, ComponentLink2Description=http://www.samsungsem.com/kr/support/library/product-catalog/__icsFiles/afieldfile/2015/09/22/CHIP_RESISTOR_2015.pdf, ComponentLink2URL=http://www.samsungsem.com/kr/support/library/product-catalog/__icsFiles/afieldfile/2015/09/22/CHIP_RESISTOR_2015.pdf, ComponentLink3Description=http://www.samsungsem.com/servlet/FileDownload?type=spec&file=RC0603F100CS.pdf, ComponentLink3URL=http://www.samsungsem.com/servlet/FileDownload?type=spec&file=RC0603F100CS.pdf, Composition="Thick Film", Contact Plating=Tin, Description 1="RES SMD 4.7K OHM 1% 1/20W 0201", Height=0.01inch, Lead Free="Lead Free", Length=0.024inch, Number of Terminations=2, Packaging="Tape and Reel", Pricing 1="1=0.1, 10=0.021, 100=0.0086, 1000=0.0039, 2500=0.0033, 5000=0.0028 (USD)", Radiation Hardening=No, Resistance=4.7kR, Stock 1=51051, Supplier 1=Digi-Key, Width=0.012inch
R4: library part R-0201(0603), "___ OHM ___ mW 0201(0603) SMD", Case/Package=0201, Case Code (Metric)=0603, Manufacturer=Yageo, Manufacturer Part Number=RC0201FR-07100KL, Max Operating Temperature=125°C, Max Power Dissipation=50mW, Min Operating Temperature=-55°C, Package Quantity=10000, Supplier Part Number 1=311-100KMDKR-ND, Temperature Coefficient=200ppm/°C, Tolerance=1%, Voltage Rating=25V, Case Code (Imperial)=0201, ComponentLink1Description=https://datasheet.ciiva.com/7660/1421516-7660806.pdf, ComponentLink1URL=https://datasheet.ciiva.com/7660/1421516-7660806.pdf, ComponentLink2Description=https://datasheet.ciiva.com/2493/pyu-r-int-thick-7-2493769.pdf, ComponentLink2URL=https://datasheet.ciiva.com/2493/pyu-r-int-thick-7-2493769.pdf, ComponentLink3Description=https://datasheet.ciiva.com/2493/pyu-r-int-thick-7-2493770.pdf, ComponentLink3URL=https://datasheet.ciiva.com/2493/pyu-r-int-thick-7-2493770.pdf, ComponentLink4Description=https://datasheet.ciiva.com/26829/getdatasheetpartid-420441-26829850.pdf, ComponentLink4URL=https://datasheet.ciiva.com/26829/getdatasheetpartid-420441-26829850.pdf, ComponentLink5Description=https://datasheet.ciiva.com/46391/1421516-46391338.pdf, ComponentLink5URL=https://datasheet.ciiva.com/46391/1421516-46391338.pdf, ComponentLink6Description=https://datasheet.ciiva.com/2493/pyu-r-int-thick-7-2493771.pdf, ComponentLink6URL=https://datasheet.ciiva.com/2493/pyu-r-int-thick-7-2493771.pdf, ComponentLink7Description=https://datasheet.ciiva.com/16855/pyu-rc0201-51-rohs-l-8-16855774.pdf, ComponentLink7URL=https://datasheet.ciiva.com/16855/pyu-rc0201-51-rohs-l-8-16855774.pdf, ComponentLink8Description=https://datasheet.ciiva.com/22698/1563626-22698495.pdf, ComponentLink8URL=https://datasheet.ciiva.com/22698/1563626-22698495.pdf, Composition="Thick Film", Contact Plating=Tin,Matte, Depth=0.3mm, Description 1="RES SMD 100K OHM 1% 1/20W 0201", Height=0.01inch, Lead Free="Lead Free", Length=0.024inch, Military Standard=Not, Number of Pins=2, Number of Terminations=2, Packaging="Tape and Reel", Power Rating=50mW, Pricing 1="1=0.1, 10=0.057, 100=0.0232, 1000=0.0104, 2500=0.009, 5000=0.0075 (USD)", REACH SVHC="No SVHC", Resistance=100kR, Stock 1=5575803, Supplier 1=Digi-Key, Termination=SMD/SMT, Voltage Rating (DC)=25V, Width=0.012inch
R5: library part R-0201(0603), "___ OHM ___ mW 0201(0603) SMD", Case/Package=0201, Case Code (Metric)=0603, Manufacturer=Yageo, Manufacturer Part Number=RC0201FR-0730KL, Max Operating Temperature=125°C, Max Power Dissipation=50mW, Min Operating Temperature=-55°C, Package Quantity=10000, Supplier Part Number 1=YAG2281CT-ND, Temperature Coefficient=200ppm/°C, Tolerance=1%, Voltage Rating=25V, Case Code (Imperial)=0201, ComponentLink1Description=http://components.arrow.com/part/dataview/0323_03297116, ComponentLink1URL=http://components.arrow.com/part/dataview/0323_03297116, ComponentLink2Description=http://www.yageo.com.tw/exep/pages/download/literatures/PYu-R_INT-thick_7.pdf, ComponentLink2URL=http://www.yageo.com.tw/exep/pages/download/literatures/PYu-R_INT-thick_7.pdf, ComponentLink3Description=http://www.yageo.com/documents/recent/PYu-RC_Group_51_RoHS_L_8.pdf, ComponentLink3URL=http://www.yageo.com/documents/recent/PYu-RC_Group_51_RoHS_L_8.pdf, ComponentLink4Description=http://www.mouser.com/ds/2/447/RC0201-559633.pdf, ComponentLink4URL=http://www.mouser.com/ds/2/447/RC0201-559633.pdf, Composition="Thick Film", Depth=0.3mm, Description 1="Thick Film Resistors - SMD 30K OHM 1%", Height=0.01inch, Lead Free="Lead Free", Length=0.6mm, Military Standard=Not, Number of Terminations=2, Packaging="Tape and Reel", Power Rating=50mW, Pricing 1="1=0.1, 10=0.046, 100=0.0187, 1000=0.0084, 2500=0.0073, 5000=0.006 (USD)", Resistance=30kR, Stock 1=45325, Supplier 1=Digi-Key, Termination=SMD/SMT, Width=0.012inch
R6 R8: library part R-0402(1005), "___ OHM ___ mW 0402(1005) SMD", Case/Package=0402, Case Code (Metric)=1005, Manufacturer=Panasonic, Manufacturer Part Number=ERJ-2GE0R00X, Max Operating Temperature=155°C, Max Power Dissipation=100mW, Min Operating Temperature=-55°C, Package Quantity=1, Supplier Part Number 1=P0.0JCT-ND, Temperature Coefficient=600ppm/°C, Tolerance=5%, Voltage Rating=50V, Case Code (Imperial)=0402, ComponentLink1Description=https://datasheet.ciiva.com/48531/aoa0000ce1-48531077.pdf, ComponentLink1URL=https://datasheet.ciiva.com/48531/aoa0000ce1-48531077.pdf, ComponentLink2Description=https://datasheet.ciiva.com/16783/70260739-16783734.pdf, ComponentLink2URL=https://datasheet.ciiva.com/16783/70260739-16783734.pdf, ComponentLink3Description=https://datasheet.ciiva.com/11821/0900766b80f806dd-11821176.pdf, ComponentLink3URL=https://datasheet.ciiva.com/11821/0900766b80f806dd-11821176.pdf, ComponentLink4Description=https://datasheet.ciiva.com/17215/aoa0000ce1-17215386.pdf, ComponentLink4URL=https://datasheet.ciiva.com/17215/aoa0000ce1-17215386.pdf, ComponentLink5Description=https://datasheet.ciiva.com/43460/1678796-43460347.pdf, ComponentLink5URL=https://datasheet.ciiva.com/43460/1678796-43460347.pdf, ComponentLink6Description=https://datasheet.ciiva.com/5959/1678796-5959692.pdf, ComponentLink6URL=https://datasheet.ciiva.com/5959/1678796-5959692.pdf, ComponentLink7Description=https://datasheet.ciiva.com/30097/4aoa0000ce1-30097116.pdf, ComponentLink7URL=https://datasheet.ciiva.com/30097/4aoa0000ce1-30097116.pdf, ComponentLink8Description=https://datasheet.ciiva.com/28695/1678796-28695758.pdf, ComponentLink8URL=https://datasheet.ciiva.com/28695/1678796-28695758.pdf, ComponentLink9Description=https://datasheet.ciiva.com/46389/1678796-46389518.pdf, ComponentLink9URL=https://datasheet.ciiva.com/46389/1678796-46389518.pdf, ComponentLink10Description=https://datasheet.ciiva.com/16778/70260739-16778335.pdf, ComponentLink10URL=https://datasheet.ciiva.com/16778/70260739-16778335.pdf, Composition="Thick Film", Contact Plating=Tin, Depth=0.5mm, Description 1="Res Thick Film 0402 0 Ohm Molded SMD Automotive T/R", Height=0.35mm, Lead Free="Lead Free", Length=1mm, Military Standard=Not, Mount="Surface Mount", Number of Terminations=2, Packaging="Tape and Reel", Power Rating=100mW, Pricing 1="1=0.1, 10=0.028, 25=0.0204, 50=0.0154, 100=0.0114, 250=0.0087, 500=0.007, 1000=0.0051, 5000=0.0037 (USD)", Radiation Hardening=No, REACH SVHC="No SVHC", Resistance=0mR, Stock 1=31438214, Supplier 1=Digi-Key, Termination=SMD/SMT, Voltage Rating (DC)=50V, Width=0.02inch
U4: "TI Digital I2C Temperature Sensor", Manufacturer="Texas Instruments", Manufacturer Part Number=TMP116AIDRVT, Max Operating Temperature=150°C, Min Operating Temperature=-55°C, Supplier Part Number 1=296-46944-1-ND, Interface=I2C,SMBus,2-Wire, Pricing 1="1=4.01, 10=3.599, 100=2.9485 (USD)", Stock 1=995, Supplier 1=Digi-Key
U5: "3V LDO", Dropout Voltage=50mV, Manufacturer="Analog Devices", Manufacturer Part Number=ADP172ACBZ-3.0-R7, Max Input Voltage=3.6V, Max Operating Temperature=125°C, Max Output Current=300mA, Max Output Voltage=3V, Max Supply Current=170uA, Min Current Limit=400mA, Min Input Voltage=1.6V, Min Operating Temperature=-40°C, Min Output Voltage=800mV, Nominal Supply Current=23uA, Package Quantity=3000, Power Supply Rejection Ratio (PSRR)=73dB, Quiescent Current=60uA, Supplier Part Number 1=ADP172ACBZ-3.0-R7CT-ND, ComponentLink1Description=https://datasheet.ciiva.com/2056/adp172-2056690.pdf, ComponentLink1URL=https://datasheet.ciiva.com/2056/adp172-2056690.pdf, ComponentLink2Description=https://datasheet.ciiva.com/2056/adp172-2056691.pdf, ComponentLink2URL=https://datasheet.ciiva.com/2056/adp172-2056691.pdf, ComponentLink3Description=https://datasheet.ciiva.com/2056/adp172-2056692.pdf, ComponentLink3URL=https://datasheet.ciiva.com/2056/adp172-2056692.pdf, ComponentLink4Description=https://datasheet.ciiva.com/3224/adp172-3224693.pdf, ComponentLink4URL=https://datasheet.ciiva.com/3224/adp172-3224693.pdf, ComponentLink5Description=https://datasheet.ciiva.com/17365/adp172-17365245.pdf, ComponentLink5URL=https://datasheet.ciiva.com/17365/adp172-17365245.pdf, ComponentLink6Description=https://datasheet.ciiva.com/48694/001251525-da-01-en-ic-reg-ldo-adp172acbz-3-0-r7-wlcsp-4-adi-48694412.pdf, ComponentLink6URL=https://datasheet.ciiva.com/48694/001251525-da-01-en-ic-reg-ldo-adp172acbz-3-0-r7-wlcsp-4-adi-48694412.pdf, Contact Plating=Copper,Tin,Silver, Description 1="Linear Voltage Regulator IC Positive Fixed 1 Output 3V 300mA 4-WLCSP (0.95x1.03)", Lead Free="Contains Lead", Mount="Surface Mount", Number of Outputs=1, Number of Pins=4, Number of Regulators=1, Operating Supply Current=23uA, Output Current=300mA, Output Voltage=3V, Packaging="Tape and Reel", Polarity=Positive, Pricing 1="1=1.13, 10=1.013, 100=0.7896, 500=0.6523, 1000=0.515 (USD)", Radiation Hardening=No, Stock 1=438, Supplier 1=Digi-Key
U7: "PSOC 4 CYBLE", Frequency=48MHz, Manufacturer=Cypress, Manufacturer Part Number=CY8C4247FNI-BL483T, Max Operating Temperature=85°C, Max Supply Voltage=5.5V, Min Operating Temperature=-40°C, Min Supply Voltage=1.71V, Package Quantity=2000, Supplier Part Number 1=428-4490-ND, ComponentLink1Description=http://www.cypress.com/?docID=50617, ComponentLink1URL=http://www.cypress.com/?docID=50617, ComponentLink2Description=http://www.cypress.com/file/137466/download, ComponentLink2URL=http://www.cypress.com/file/137466/download, Contact Plating=Copper,Tin,Silver, Core Architecture=ARM, Data Bus Width=32b, Interface=I2C,SPI,I2S,IrDA,SSP,UART,USART,LIN, Lead Free="Lead Free", Max Frequency=48MHz, Memory Size=128KB, Memory Type=FLASH, Mount="Surface Mount", Number of I/Os=36, Number of Programmable I/O=36, Number of Timers/Counters=4, Oscillator Type=Internal, Packaging="Tape and Reel", Peripherals="Brown-out Detect/Reset,POR,PWM,WDT,LVD,LCD", Pricing 1="1=7.05, 10=6.345, 25=5.7812, 100=5.217, 250=4.794, 500=4.371, 1000=3.807, 2500=3.666 (USD)", RAM Size=16KB, Stock 1=250, Supplier 1=Digi-Key, Watchdog Timer=Yes
Y3: "24 MHz Crystal", Case/Package=SMD/SMT, ESR (Equivalent Series Resistance)=60R, Frequency=24MHz, Frequency Stability=10ppm, Load Capacitance=8pF, Manufacturer="ECS International", Manufacturer Part Number=ECS-240-8-36CKM-TR, Max Operating Temperature=70°C, Min Operating Temperature=-20°C, Package Quantity=1000, Supplier Part Number 1=XC1557CT-ND, ComponentLink1Description=http://www.ecsxtal.com/store/pdf/partnumber4.pdf, ComponentLink1URL=http://www.ecsxtal.com/store/pdf/partnumber4.pdf, ComponentLink2Description=http://www.mouser.com/ds/2/122/ECX-2236-15751.pdf, ComponentLink2URL=http://www.mouser.com/ds/2/122/ECX-2236-15751.pdf, Description 1="Crystals 24MHz 10ppm", Frequency Tolerance=10ppm, Height=0.026inch, Length=0.098inch, Mount="Surface Mount", Packaging="Tape and Reel", Pricing 1="1=1.12, 10=0.987, 50=0.9224, 100=0.8151, 500=0.7722 (USD)", Stock 1=30313, Supplier 1=Digi-Key, Termination=SMD/SMT, Tolerance=10ppm, Width=0.079inch
Y4: library part ABS05, "Crystal Oscillator", Case/Package=SMD/SMT, ESR (Equivalent Series Resistance)=90kR, Frequency=32.768kHz, Frequency Tolerance=20ppm, Load Capacitance=12.5pF, Manufacturer=Abracon, Manufacturer Part Number=ABS05-32.768KHZ-T, Max Operating Temperature=85°C, Min Operating Temperature=-40°C, Package Quantity=3000, Supplier Part Number 1=535-11899-1-ND, ComponentLink1Description=https://datasheet.ciiva.com/23810/abs05-23810480.pdf, ComponentLink1URL=https://datasheet.ciiva.com/23810/abs05-23810480.pdf, ComponentLink2Description=https://datasheet.ciiva.com/6728/abs05-6728949.pdf, ComponentLink2URL=https://datasheet.ciiva.com/6728/abs05-6728949.pdf, ComponentLink3Description=https://datasheet.ciiva.com/6728/abs05-6728950.pdf, ComponentLink3URL=https://datasheet.ciiva.com/6728/abs05-6728950.pdf, ComponentLink4Description=https://datasheet.ciiva.com/16411/abs05-16411149.pdf, ComponentLink4URL=https://datasheet.ciiva.com/16411/abs05-16411149.pdf, Depth=1mm, Description 1="32.768kHz ±20ppm Crystal 12.5pF 90 kOhm -40°C ~ 85°C  Surface Mount 2-SMD", Height=0.02inch, Lead Free="Lead Free", Length=1.6mm, Mount="Surface Mount", Number of Pins=2, Packaging="Tape and Reel", Pricing 1="1=1.03, 10=0.911, 50=0.8514, 100=0.7524, 500=0.7128, 1000=0.594 (USD)", Radiation Hardening=No, REACH SVHC="No SVHC", Series Resistance=90kR, Stock 1=92285, Supplier 1=Digi-Key, Termination=SMD/SMT, Tolerance=20ppm, Width=0.039inch

## Via types
v1: diameter 22, hole 12, NiCuAu to Signal Layer, 89 vias

## Nets (pads, with @x,y where several pads share a name; then routed paths per layer and width w, separated by ;. In a path a pad name is that pad's centre, name@x,y a point inside that pad or via, vN(x,y) a via of type N, cw(c..) or ccw(c..) an arc to the next point about the centre after c; other vN are vias at no path point)
ALERT: R7.1 U4.3 U7.B1 | length 1270.2
  Signal Layer w5: 84.66,66.41 39.08,66.41 cw(c39.08,82.08) 28,71 cw(c35.24,78.24) 25,78.24 25,345.34 cw(c38.66,345.34) 29,355 cw(c38.66,345.34) 38.66,359 ; 110.5,359 38.66,359 ; 418.76,613.5 402,613.5 cw(c402,624.35) 394.32,616.68 332.48,678.52 ccw(c297.52,643.55) 297.52,693 197,693 cw(c197,732) 158,732 ccw(c143,732) 143,747 41,747 ccw(c41,731) 25,731 25,372.66 ccw(c38.66,372.66) 38.66,359
ANTENNA: R8.1 U7.H7 | length 150.9
  RF Layer w5: 513.24,519.01 527.99,519.01 cw(c527.99,515) 532,515 532,508 ccw(c538,508) 538,502 560,502
  RF Layer w20: 560,502 594,502 cw(c594,486) 610,486 610,453.68
BATTERY_LEVEL: R4.2 R5.1 U7.A4 | length 571.5
  Signal Layer w5: 466,629.24 466,708 cw(c483,708) 483,725 796,725 cw(c796,664.64) 838.67,707.33 852.17,693.83 ccw(c859,700.66) 859,691 938,691
GND: C1.2 C2.2 C3.2 C4.2 C5.2 C7.2 C8.2 C9.2 C15.2 C17.2 C18.2 C21.2 C23.2 C27.2 C28.2 C34.2 C35.2 C40.1 C41.1 C42.2 GND.1 J9.1 L1.1 R1.2 R5.2 U4.2 U4.4 U4.7 U5.B2 U6.1 U7.A2 U7.A5 U7.A6 U7.B2 U7.C1 U7.D6 U7.E8 U7.F1 U7.F6 U7.F7 U7.G4 U7.G5 U7.G6 U7.G7 U7.G8 U7.H5 U7.H6 Y3.2 Y3.4 | length 1736.8
  Signal Layer w5: 84.66,92 126,92 126,71 130.59,66.41 296.63,66.41 300,63.04 ; 369.68,550.5 418.76,550.5 ; 387.13,599.87 ccw(c392.25,604.99) 392.25,597.75 418.76,597.75 434.5,613.5 434.5,629.24 ; 466,534.76 481.75,534.76 ; 481.75,519.01 481.75,534.76 ; 481.75,629.24 489.2,629.24 ; v1(489,669) 489,673.8 489.2,674 489.2,629.24 ; 497.5,519.01 497.5,534.76 ; 528.99,566.25 513.24,550.5 497.5,550.5 ; v1(672,440) 672,502 ccw(c647,502) 647,527 569.24,527 cw(c569.24,537.24) 562,530 ccw(c550.52,518.52) 550.52,534.76 497.5,534.76 ; v1(934,542) 934,574.04 ; v1(950,1035) 950,1149 951,1150 ; 481.75,534.76 497.5,534.76 ; 489.2,629.24 497.5,629.24 497.5,550.5 ; 497.5,534.76 497.5,550.5
  Signal Layer w10: v1(276,674) 309,674 cw(c309,664.34) 315.83,671.17 387.13,599.87 ; v1(287,583) 318,583 cw(c318,558.86) 335.07,575.93 354,557 ccw(c369.68,572.68) 369.68,550.5 ; 614,798.37 614,818 cw(c626,818) 626,830 664,830 cw(c664,829) v1(665,829) ; v1(762,825) 791,825 cw(c791,817) 799,817 799,798.37
  Signal Layer w15: v1(875,515) 875,574.04
  Signal Layer w20: v1(336,264) 336,264.35 375.35,303.7 416.05,263 v1(417,263) ; 367,390 372,390 v1(406,424) ; 754.04,625 754.04,542.96 787.96,542.96 v1(788,543)
  other v1: 31,25 630,37 693,37 448,39 353,40 558.85,41.58 744,62 598.82,75.42 682,83 544,91 356,108 208,124 545,151 682,167 742,168 548,214 727,234 849,262 946,273 548,275 216,281 714,289 795,300 945,336 686,340 753,345 547,348 871,362 942,394 800,395 733,396 549,413 175,425 880,447 943,450 793,454 183,647 790,657.9 969,758 445,787 202,840 578,869 797,902 677,907 387,933 742,988 240,1003 365,1007 501,1023 632,1029
LED_RED: D1.A U7.D1 | length 866.7
  RF Ground w15: v1(252,643) 252,228 ccw(c288.65,228) 288.65,191.35 v1(456,191.35)
  Signal Layer w5: 381.05,586.95 ccw(c393,598.9) 393,582 418.76,582
  Signal Layer w10: v1(252,643) 307,643 cw(c307,599.54) 337.73,630.27 381.05,586.95
  Signal Layer w15: 456,154 v1(456,191.35)
NetC6_1: C6.1 R8.2 | length 52
  RF Layer w20: 610,359 610,411
NetC6_2: C6.2 C7.1 L1.2 L3.1 | length 154.7
  RF Layer w20: 609.65,165.36 609.65,320.08
NetC34_1: C34.1 C42.1 L2.1 R6.2 U5.A2 | length 267.3
  Signal Layer w5: 483,758 484,759
  Signal Layer w10: 259,765 266,758 318,758
  Signal Layer w20: 318,758 483,758 ; 318,765 318,804
NetD1_K: D1.K R1.1 | length 68
  Signal Layer w15: 414.35,86 414.35,154
NetE2_1: E2.1 L3.2 | length 214.2
  RF Layer w20: 609.65,124.81 823.81,124.81
SCL: R3.2 SCL.1 U4.1 U6.3 U7.H1 | length 1542.5
  RF Ground w20: v1(76,300) 76,309.74 75.5,310.24 cw(c114.76,310.24) 87,338 111.71,362.71 ccw(c41,433.42) 141,433.42 v1(141,658) 141,694.79 cw(c192.21,694.79) 155.99,730.99 277.71,852.71 ccw(c207,923.42) 307,923.42 v1(307,1035)
  Signal Layer w5: v1(307,1035) 307,1149.57 307.43,1150 ; 331.27,519.01 418.76,519.01
  Signal Layer w10: 141.5,581.4 141.5,552.87 ccw(c156.87,552.87) 146,542 ccw(c153.24,549.24) 153.24,539 283,539 cw(c283,514.52) 300.31,531.83 ccw(c331.27,562.78) 331.27,519.01
  Signal Layer w20: 84.66,124 84.66,197.75 ccw(c68.75,197.75) 80,209 cw(c89.66,218.66) 76,218.66 v1(76,300) 110.25,300 ; 141.5,581.4 v1@141.5,658
SDA: R2.2 SDA.1 U4.6 U6.2 U7.J1 | length 1499.9
  RF Ground w20: v1(137,180) 137,225.72 cw(c205.28,225.72) 157,274 ccw(c2.49,428.51) 221,428.51 v1(221,518) 221,683 cw(c269.28,683) 235.14,717.14 408.42,890.42 ccw(c341.85,957) 436,957 v1(436,1035)
  Signal Layer w5: v1(221,518) cw(c223.41,515.59) v1@223.41,519 ; 326.34,503.26 418.76,503.26 ; v1(436,1035) 436,1149.86 436.14,1150
  Signal Layer w10: v1@223.41,519 288.34,519 cw(c288.34,505.34) 298,515 ccw(c326.34,543.34) 326.34,503.26
  Signal Layer w15: 141.5,506.6 195.6,506.6 207,518 v1(221,518)
  Signal Layer w20: 110.25,239 110,238.75 110,218 ccw(c136.56,218) 117.78,199.22 v1(137,180) 155.5,161.5 cw(c126.92,132.92) 167.34,132.92 167.34,122
SWD_CLK: SWD_CLK.1 U7.F2 | length 781.6
  RF Ground w15: v1@310.5,617 310.5,681.08 cw(c410.5,681.08) 339.79,751.79 551.86,963.86 ccw(c517.72,998) 566,998 566,1032.59 ccw(c562.59,1032.59) v1(565,1035)
  Signal Layer w5: 392,568 416.3,568 433.8,550.5 434.5,550.5 ; 564.86,1150 565,1149.86 v1(565,1035)
  Signal Layer w10: v1(310,617) 312,617 cw(c312,578.37) 339.31,605.69 366.39,578.61 ccw(c392,604.21) 392,568
SWD_DATA: SWD_DATA.1 U7.G1 | length 892.5
  RF Ground w15: v1(336,538) 336.5,538.5 336.5,694.17 cw(c392.83,694.17) 353,734 528.71,909.71 cw(c599.42,839) 599.42,939 634.37,939 ccw(c634.37,993.63) 673,955 682.98,964.98 ccw(c653.96,994) 695,994 v1(695,1035)
  Signal Layer w5: v1(336,538) 339.24,534.76 v1@341.24,534.76 ; 391,534.76 418.76,534.76 ; 693.57,1150 695,1148.57 v1(695,1035)
  Signal Layer w10: v1@341.24,534.76 391,534.76
V_BATT: C4.1 C5.1 C27.1 C28.1 J8.1 R4.1 R6.1 U5.A1 U5.B1 V_BATT.1 | length 1637.5
  Signal Layer w5: 50,1150 50,1050.9 ccw(c73.9,1050.9) 57,1034 cw(c25.62,1002.62) 70,1002.62 70,891 ; 239.32,783.84 239.32,829.68 ; 249.82,840.18 253,843.37 ; 259,783.84 259,831 ; 480,818 480,798 ccw(c494,798) 494,784 563.93,784 ccw(c563.93,801.07) 576,789 577.39,790.39 ccw(c551.79,816) 588,816 588,828.51 cw(c608.49,828.51) 594,843 cw(c630.21,806.79) 630.21,858 829,858 cw(c829,843) 844,843 844,826 ccw(c897.11,826) 859.55,788.45 868,780 cw(c846.27,758.27) 877,758.27 877,722.5
  Signal Layer w20: 70,891 250.5,891 ; 250.5,892 480.31,892 ; 253,843.37 318,843.37 ; 480,818 480,860 480.31,860.32 480.31,892 ; 480.31,965 480.31,892
  Signal Layer w25: 249.82,815 249.82,840.18 ; 250.5,841.5 250.5,891 250.5,892
VCC: C2.1 C3.1 C17.1 C18.1 C21.1 C23.1 C40.2 C41.2 L2.2 R2.1 R3.1 R7.2 R11.1 U4.5 U6.4 U7.A8 U7.D2 U7.F8 U7.G2 U7.J3 U7.J6 VCC.1 | length 4187.7
  RF Ground w5: v1@569.59,695 cw(c569.59,691.59) v1@572,694
  RF Ground w15: v1(440,695) v1@569.59,695
  RF Ground w20: v1(177,1035) 177,931.17 cw(c77,931.17) 147.71,860.46 91,803.75 ccw(c119.97,774.78) 79,774.78 v1(79,648) v1(79,426) 79,420.11 cw(c3.89,420.11) 57,367 ccw(c85.97,338.03) 45,338.03 45,228 ccw(c122,228) 122,151 481,151 ccw(c481,191) 521,191 v1(521,461) 521,530 cw(c542,530) 537.46,550.5 ; v1(450.25,452.25) 450.25,509 cw(c491.76,509) 491.76,550.5 537.46,550.5 ; v1(572,759) v1(572,695) 572,694 ccw(c572,692.8) 570.8,692.8 v1(570.8,550.5) 537.46,550.5
  Signal Layer w5: 78.04,679 78.5,678.54 ; 167.34,92 195.68,92 ccw(c195.68,95.28) 198,92.96 ; v1(177,1035) 177,1148.29 178.71,1150 ; 434.5,534.76 450.25,534.76 450.25,582 ; 434.5,582 450.25,582 ; v1(440,695) 440,667.9 ccw(c463.9,667.9) 447,651 cw(c439.15,643.15) 450.25,643.15 450.25,582 ; v1(450.25,452.25) 450.25,503.26 ; 497.5,503.26 497.5,484.5 v1(521,461) ; 528.99,550.5 v1(570.8,550.5) ; 528.99,629.24 557.24,629.24 ccw(c557.24,644) 572,644 v1(572,695) 769,695 v1(770,694) 806,694 cw(c806,677) 823,677 823,627.75
  Signal Layer w20: 78.04,722 78.5,721.54 78.5,678.54 78.5,581.4 ; v1(79,426) 118.1,426 cw(c118.1,402.1) 135,419 cw(c118.1,402.1) 142,402.1 142,239 ; 141.75,239 142,239 ; 198,92.96 300,92.96 ; 248,93.96 248,159 ccw(c161.09,159) 222.54,220.46 ccw(c177.77,175.69) 177.77,239 142,239 ; 515.5,759 v1(572,759) 799,759
VCCD: C1.1 U7.A7 | length 510.4
  Signal Layer w5: 513.24,629.24 513.24,697.24 cw(c529,697.24) 529,713 563.84,713 564.34,713.5 579.66,713.5 580.16,713 804.69,713 cw(c804.69,685.69) 823.99,705.01 860.86,668.14 cw(c826.72,634) 875,634 875,603.96
VREF: C15.1 U7.A1 | length 785
  RF Ground w5: v1(853,763) 897,763 cw(c897,725) 935,725 935,635 cw(c934,635) v1(934,634)
  Signal Layer w5: 418.76,629.24 418.76,723.76 cw(c432,723.76) 432,737 847,737 ccw(c847,743) 853,743 v1(853,763) ; 934,603.96 v1(934,634)
XRES: C35.1 R11.2 U7.C7 XRES.1 | length 1006.3
  RF Ground w5: v1@822,1034 v1(823,1035)
  RF Ground w10: v1(823,560) v1@823,1033
  RF Ground w15: v1@822,1034 v1@823,1033
  Signal Layer w5: 513.24,597.75 527.74,583.25 ccw(c557.32,612.83) 557.32,571 569.69,571 cw(c569.69,543.69) 588.99,563.01 603.51,548.49 ccw(c624,568.97) 624,540 649.27,540 cw(c649.27,509.27) 671,531 683.34,518.66 ccw(c697,532.31) 697,513 754,513 ; 822.29,1150 823,1149.29 v1(823,1035)
  Signal Layer w15: 754,513.04 804.2,513.04 ccw(c804.2,536.8) 821,520 ccw(c816.17,524.83) 823,524.83 v1(823,560) 823,596.25
XTAL_HF_N: J14.1 U7.H3 Y3.3 | length 268.6
  Signal Layer w5: 412,460 421.17,460 ccw(c421.17,466.83) 426,462 ccw(c411.51,476.49) 432,476.49 432,493.14 cw(c452.08,493.14) 437.88,507.34 449.55,519.01 450.25,519.01
  Signal Layer w30: 314.14,364.91 cw(c336.26,387) 305,387 305,388.86 cw(c339.14,388.86) 315,413 332,430 355.48,453.48 cw(c371.22,437.74) 371.22,460 412,460 ; 314.16,364.89 328.03,351.03
XTAL_HF_P: J13.1 U7.H4 Y3.1 | length 207.3